# Altium PCB MAX3232.PcbDoc
Units mil, origin at the board's own origin, x right, y up, seen from the top; angles counter-clockwise.
Board outline 540 x 1065 mil, 2 copper layers (Top Layer, Bottom Layer); 8 components, 12 nets, 36 pads, 9 vias.
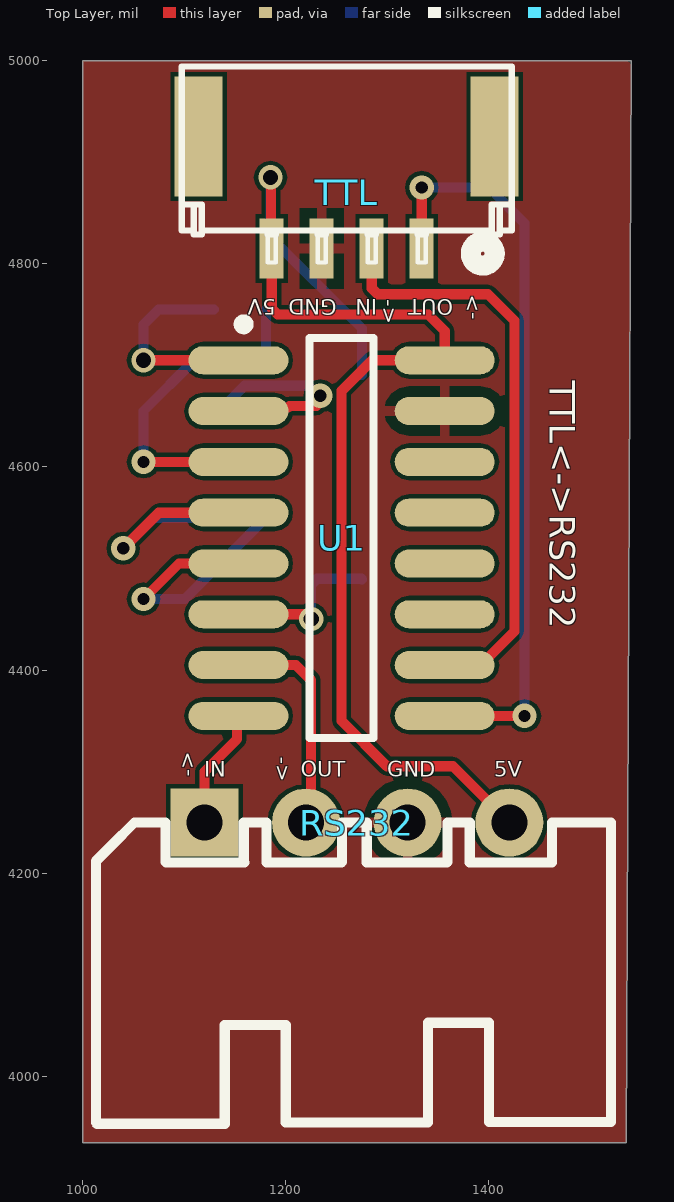
[diagram p0: Top Layer view]
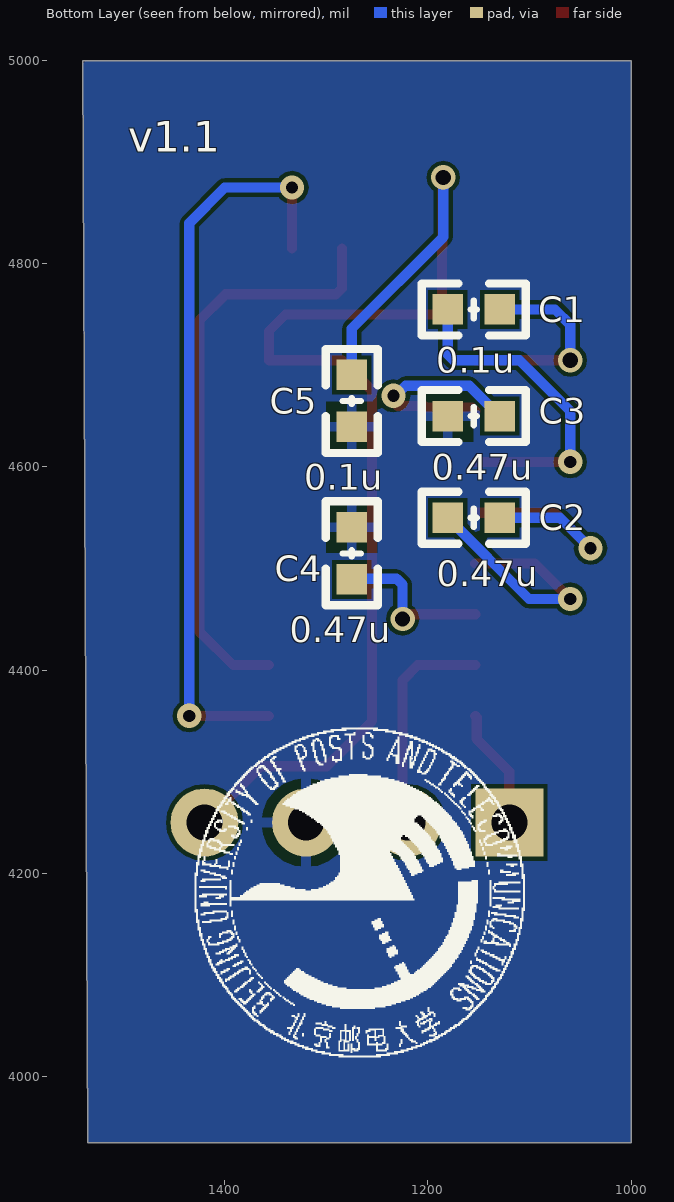
[diagram p1: Bottom Layer view, seen from below]
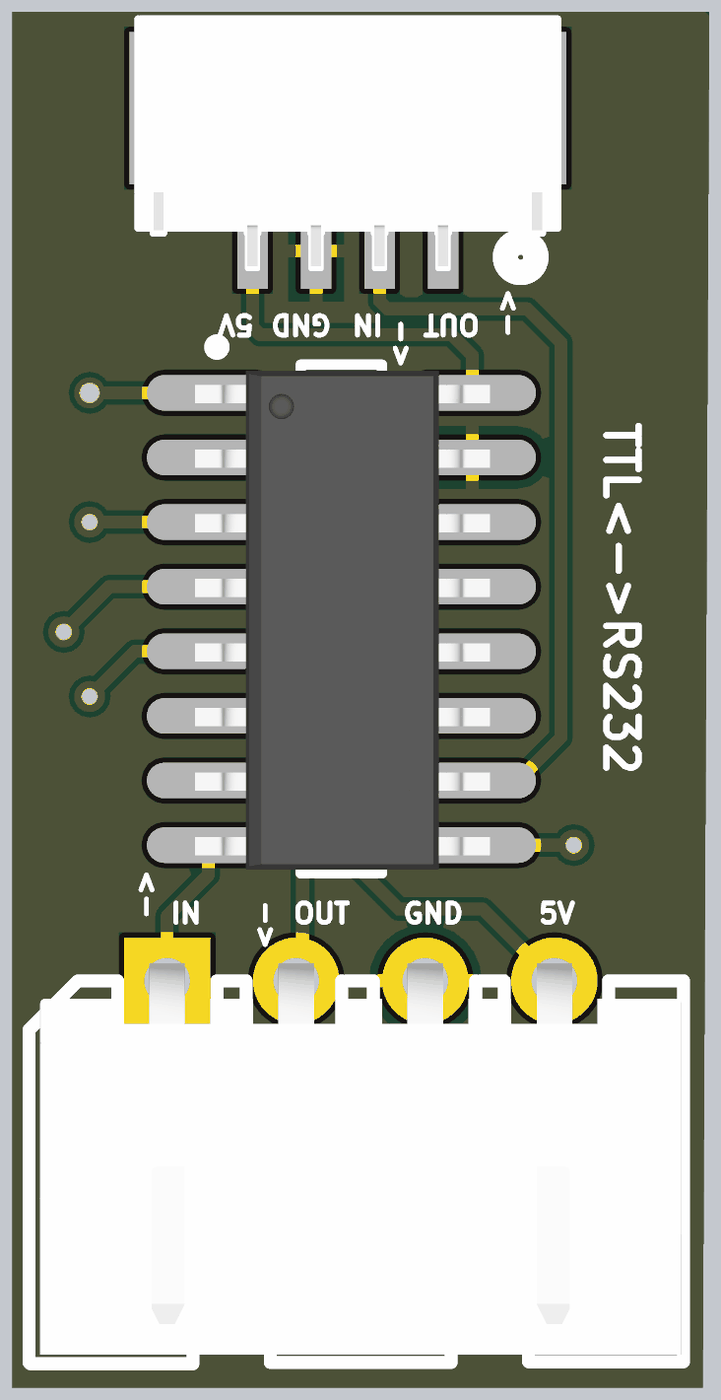
[diagram p2: 3D render of the assembled board from above, using the file's embedded part models]
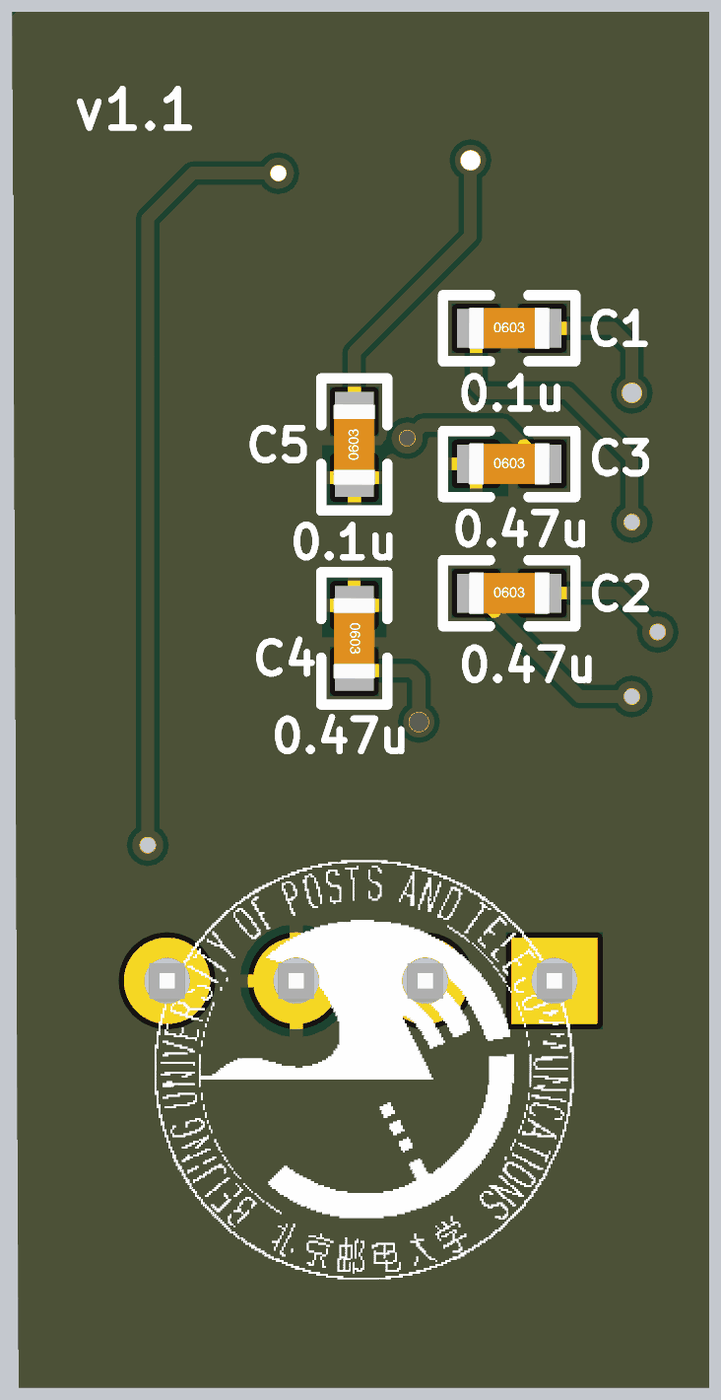
[diagram p3: 3D render of the assembled board from below, using the file's embedded part models]

## Layer stack, top to bottom
Top Solder: solder mask 0.4, Solder Resist, Dk 3.5
Top Layer: signal copper 1.4
Dielectric 1: dielectric 12.6, FR-4, Dk 4.8
Bottom Layer: signal copper 1.4
Bottom Solder: solder mask 0.4, Solder Resist, Dk 3.5

## Board outline
1000,3935 1000,5000 1540,5000 1535,3935

## Design rules (kind name [scope] priority, off if disabled: settings)
Clearance [All] p1: gap=4 ignorepadtopadclearanceinfootprint=FALSE
MinimumSolderMaskSliver [All] p1 off: minsoldermaskwidth=10
PolygonConnect [All] p1: connectstyle=Relief reliefconductorwidth=10 reliefentries=4 polygonreliefangle="90 Angle" airgapwidth=10
RoutingVias [All] p1: holewidth=28 width=50 viastyle="Through Hole" minholewidth=12 minwidth=24 maxholewidth=28 maxwidth=50
SilkToSilkClearance [All] p1 off: silktosilkclearance=10
SilkToSolderMaskClearance [IsPad] p1 off: minsilkscreentomaskgap=10 clearancetoexposedcopper=TRUE
SolderMaskExpansion [All] p1: expansion=4 istentingtop=FALSE
Width [All] p1: maxlimit=100 minlimit=10 preferedwidth=10
27 further rules are at their usual default settings.

## Components (designator, comment, footprint, x,y, rotation, side; value= is the part's Value field where it differs from the comment)
C1 "0.1u" "C 0603_L" 1155,4755 r180 bottom
C2 "0.47u" "C 0603_L" 1155,4550 r180 bottom
C3 "0.47u" "C 0603_L" 1155,4650 r180 bottom
C4 "0.47u" "C 0603_L" 1275,4515 r270 bottom
C5 "0.1u" "C 0603_L" 1275,4665 r90 bottom
RS232 "HDR-1X4" XH2.54-WI-4P 1270,4250 r0 top
TTL "HDR-1X4" GH1.25-WS-4P 1260,4913.43 r0 top
U1 "MAX3232" SOIC-16 1255,4530 r0 top

## Footprints (in the part's own frame and the unit in brackets; to place one, negate y for a bottom-side part, rotate by r counter-clockwise, add the part's x,y. Pads: shape width x height; smd on the part's side, far side on the other; paste and mask are expansions set on the pad)
"C 0603_L" [mil] "无极性贴片电容"
  rect 30x30 smd: 1(-25.59,0) 2(25.59,0)
  silkscreen extent -51,-26 51,26, body extent -31,-16 31,16, height 32
GH1.25-WS-4P [mm] "A1257WR-S-4P"
  rect 1.2x3 smd: 0(-3.7,0.3) 0(3.7,0.3)
  rect 0.6x1.5 smd: 1(1.875,-2.5) 2(0.625,-2.5) 3(-0.625,-2.5) 4(-1.875,-2.5)
  silkscreen extent -4.13,-2.93 4.12,2.05, body extent -4.12,-2.8 4.12,2.1, height 4.4
SOIC-16 [mm]
  oval 2.5x0.7 smd: 1(-2.577,4.445) 2(-2.577,3.175) 3(-2.577,1.905) 4(-2.577,0.635) 5(-2.577,-0.635) 6(-2.577,-1.905) 7(-2.577,-3.175) 8(-2.577,-4.445) 9(2.577,-4.445) 10(2.577,-3.175) 11(2.577,-1.905) 12(2.577,-0.635) 13(2.577,0.635) 14(2.577,1.905) 15(2.577,3.175) 16(2.577,4.445)
  silkscreen extent -2.57,-5 0.8,5.47, body extent -2.88,-4.92 2.92,4.88, height 1.75
XH2.54-WI-4P [mm] "接插件，4P"
  rect 1.7x1.7 hole 0.9: 1(-3.81,0)
  round 1.7 hole 0.9: 2(-1.27,0) 3(1.27,0) 4(3.81,0)
  silkscreen extent -6.53,-7.53 6.35,0, body extent -6.31,-7.35 6.31,0.35, height 5.73

## Part data
C1 C2 C3 C4 C5: library part C, "贴片电容", BOM名称=贴片电容, 下单链接=https://item.taobao.com/item.htm?ft=t&id=613637044352, 淘宝ID=小糖豆的小窝窝
RS232 TTL: library part "Header 4", "4P接插件", BOM名称=4P接插件, 下单链接=https://item.taobao.com/item.htm?ft=t&id=613637044352, 淘宝ID=小糖豆的小窝窝
U1: "通讯IC", Alias1=https://item.taobao.com/item.htm?ft=t&id=613637044352, BOM名称=通讯IC, 淘宝ID=小糖豆的小窝窝

## Via types
v1: diameter 24, hole 12, Top Layer to Bottom Layer, tented both sides, 6 vias
v2: diameter 24, hole 15, Top Layer to Bottom Layer, tented both sides, 3 vias

## Nets (pads, with @x,y where several pads share a name; then routed paths per layer and width w, separated by ;. In a path a pad name is that pad's centre, name@x,y a point inside that pad or via, vN(x,y) a via of type N, cw(c..) or ccw(c..) an arc to the next point about the centre after c; other vN are vias at no path point)
5V: C5.2 RS232.4 TTL.4 U1.16 | length 1214.8
  Top Layer w10: v2(1185,4885) 1185.59,4884.41 1185.59,4815.59 TTL.4 1186.18,4755.86 1192.04,4750 1340.24,4750 1356.46,4733.78 U1.16 1285,4705 1255,4675 1255,4350 1299.55,4305.45 1364.55,4305.45 RS232.4
  Bottom Layer w10: v2(1185,4885) 1185,4826.21 1275,4736.21 C5.2
232_IN: RS232.1 U1.8 | length 118.9
  Top Layer w10: RS232.1 1120,4300 1152.08,4332.08 1152.08,4353.53 U1.8
232_OUT: RS232.2 U1.7 | length 219.7
  Top Layer w10: U1.7 1210,4405 1225,4390 1225,4255 RS232.2
GND: C3.1 C4.1 C5.1 RS232.3 TTL.3 U1.15
NetC1_1: C1.1 U1.3 | length 331.4
  Top Layer w10: v1(1060,4605) U1.3
  Bottom Layer w10: v1(1060,4605) 1060,4655 1110,4705 1174.74,4705 1180.59,4710.86 C1.1
NetC1_2: C1.2 U1.1 | length 204.2
  Top Layer w10: v2(1060,4705) U1.1
  Bottom Layer w10: v2(1060,4705) 1060,4740 1075,4755 C1.2
NetC2_1: C2.1 U1.5 | length 261.8
  Top Layer w10: v1(1060,4470) 1095,4505 U1.5
  Bottom Layer w10: v1(1060,4470) 1100.6,4470 C2.1
NetC2_2: C2.2 U1.4 | length 229.9
  Top Layer w10: v1(1040,4520) 1075,4555 U1.4
  Bottom Layer w10: v1(1040,4520) 1070,4550 C2.2
NetC3_2: C3.2 U1.2 | length 199.8
  Top Layer w10: U1.2 1156.9,4658.36 1201.97,4658.36 1203.61,4660 v1@1230.15,4660
  Bottom Layer w10: C3.2 1159.42,4680 1222.14,4680 1232.14,4670 v1(1234,4670)
NetC4_2: C4.2 U1.6 | length 159.9
  Top Layer w10: U1.6 1216.51,4455 1221.21,4450.3 v2(1225,4450.3)
  Bottom Layer w10: v2(1225,4450.3) 1225,4484.14 1230.86,4490 1274.42,4490 C4.2
TTL_IN: TTL.2 U1.10 | length 581
  Top Layer w10: TTL.2 1284.61,4775.86 1290.46,4770 1399.14,4770 1425,4744.14 1425,4438.11 1391.89,4405 U1.10
TTL_OUT: TTL.1 U1.9 | length 743
  Top Layer w10: TTL.1 v1(1333.82,4875) ; U1.9 v1(1435,4355)
  Bottom Layer w10: v1@1330,4875 v1(1333.82,4875) 1400,4875 1435,4840 v1(1435,4355)
pads on no net: TTL.0 U1.11 U1.12 U1.13 U1.14

## Polygon pours and split planes (outlines as drawn)
GND on Top Layer "GND_L01_P000" (solid, pour order 0): 1000,3935 1000,5000 1540,5000 1535,3935
GND on Bottom Layer "GND_L02_P001" (solid, pour order 1): 1000,3935 1000,5000 1540,5000 1535,3935

## Silkscreen, mask and mechanical layers (free items; w line width, h text height)
Top Overlay:
  text "5V" at 1190,4765 h15 r180
  text "GND" at 1250,4765 h15 r180
  text "IN" at 1290,4765 h15 r180
  text "->" at 1295,4765 h15 r270
  text "OUT" at 1365,4765 h15 r180
  text "->" at 1390,4745 h15 r90
  text "TTL<->RS232" at 1460,4685 h25 r270
  text "->" at 1190,4315 h15 r270
  text "->" at 1110,4295 h15 r90
  text "IN" at 1120,4295 h15
  text "OUT" at 1215,4295 h15
  text "GND" at 1300,4295 h15
  text "5V" at 1405,4295 h15
Bottom Overlay:
  drawing of 191 lines, arcs and shapes, not listed
  text "v1.1" at 1495,4910 h30
Mechanical 1:
  the board outline again, w10